# Altium PCB Mainboard + peripherals.PcbDoc
Units mm, origin at the board's own origin, x right, y up, seen from the top; angles counter-clockwise.
Board outline 62 x 49 mm, 2 copper layers (Top Layer, Bottom Layer); 9 components, 10 nets, 57 pads, 9 vias.
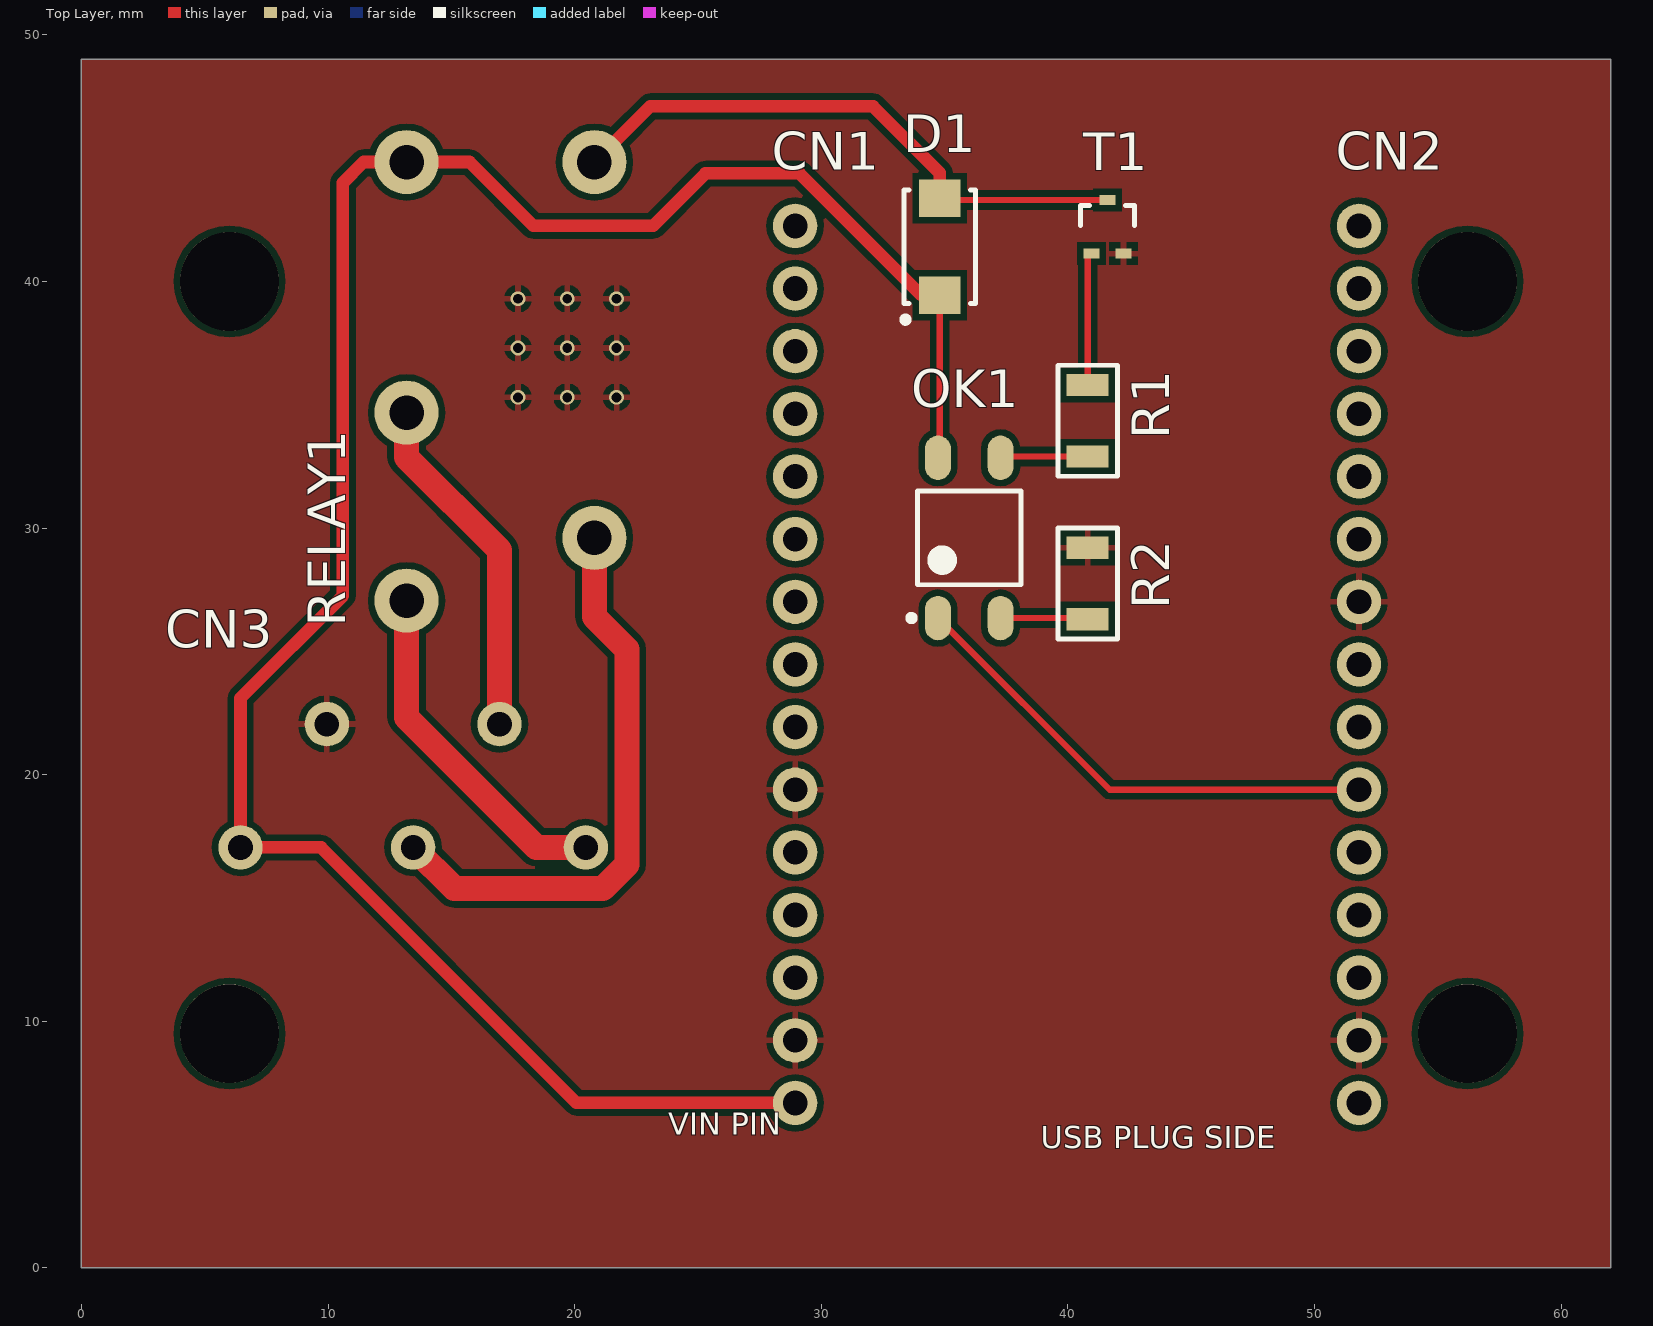
[diagram p0: Top Layer view]
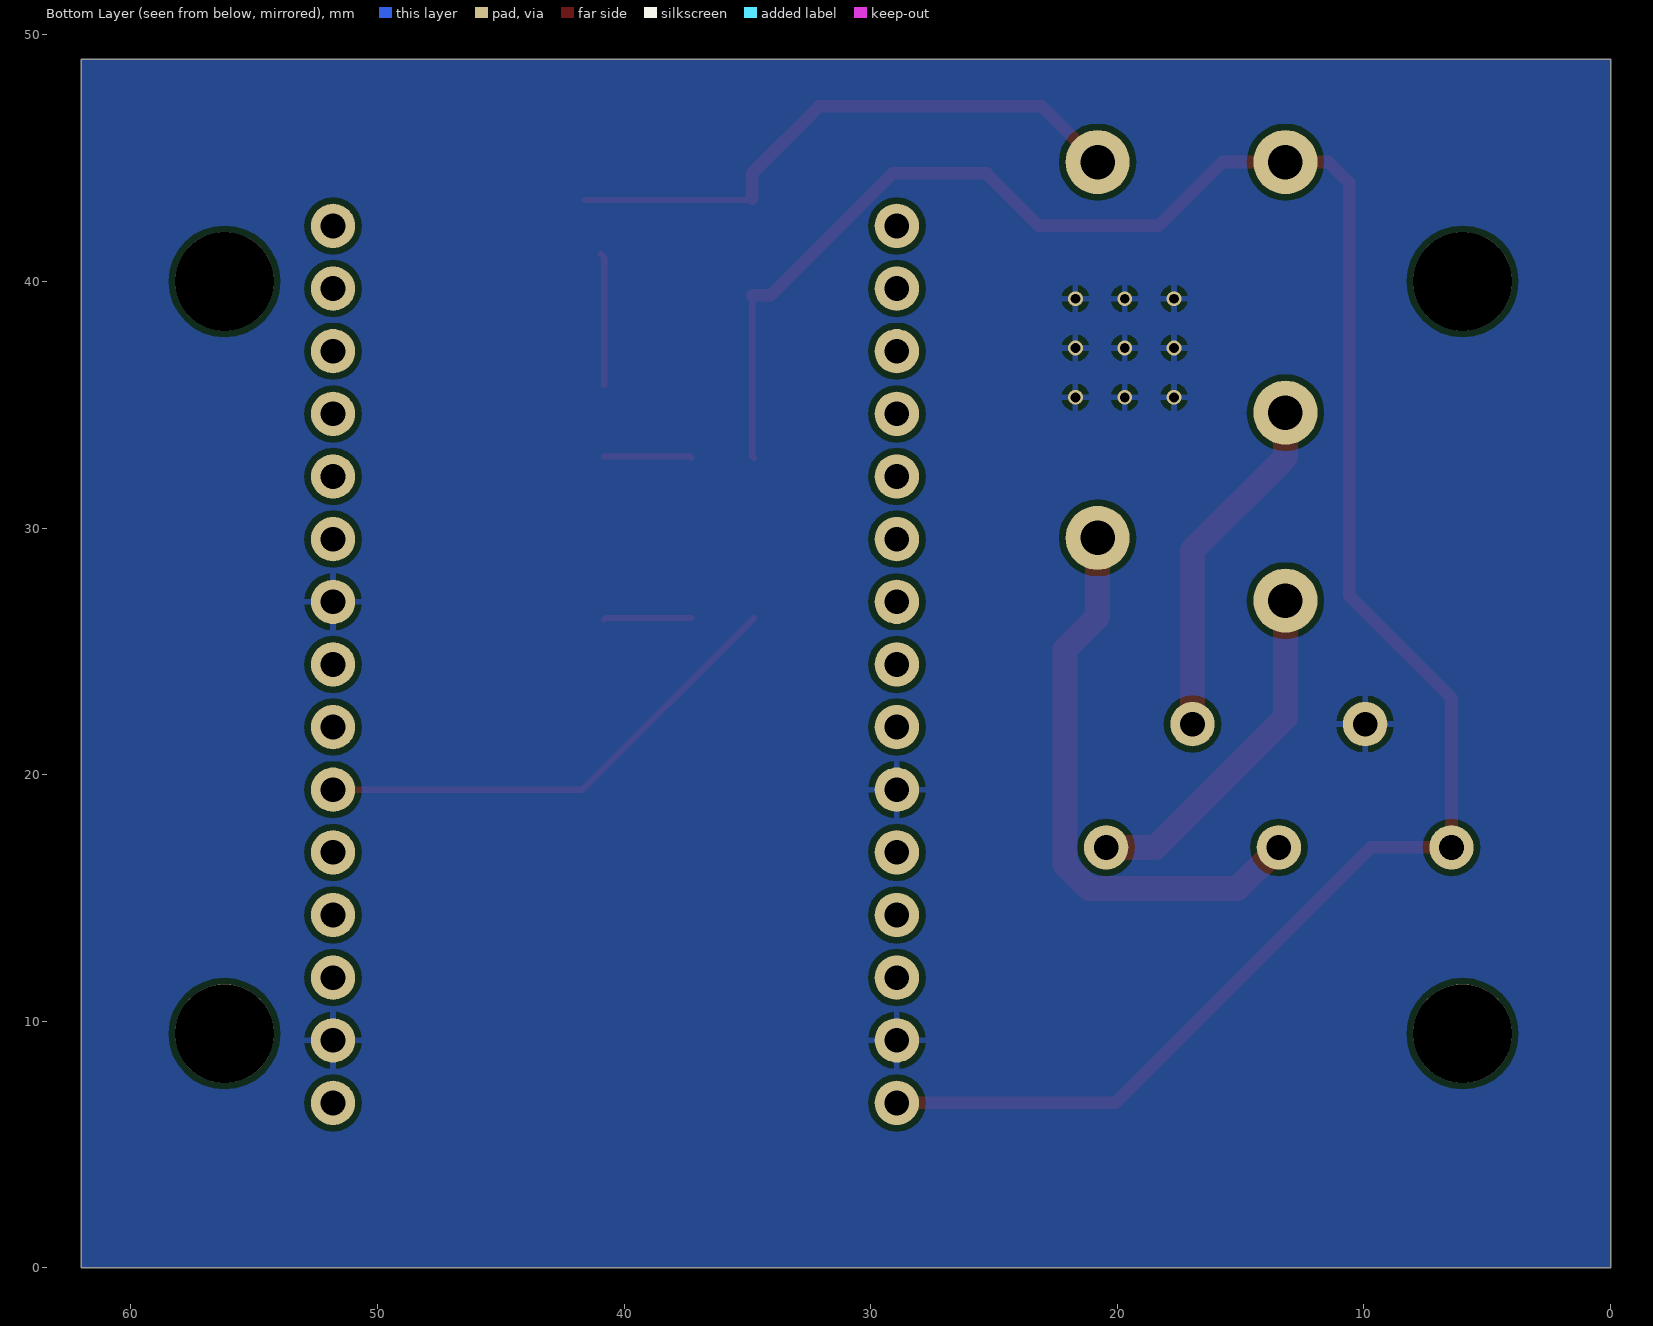
[diagram p1: Bottom Layer view, seen from below]
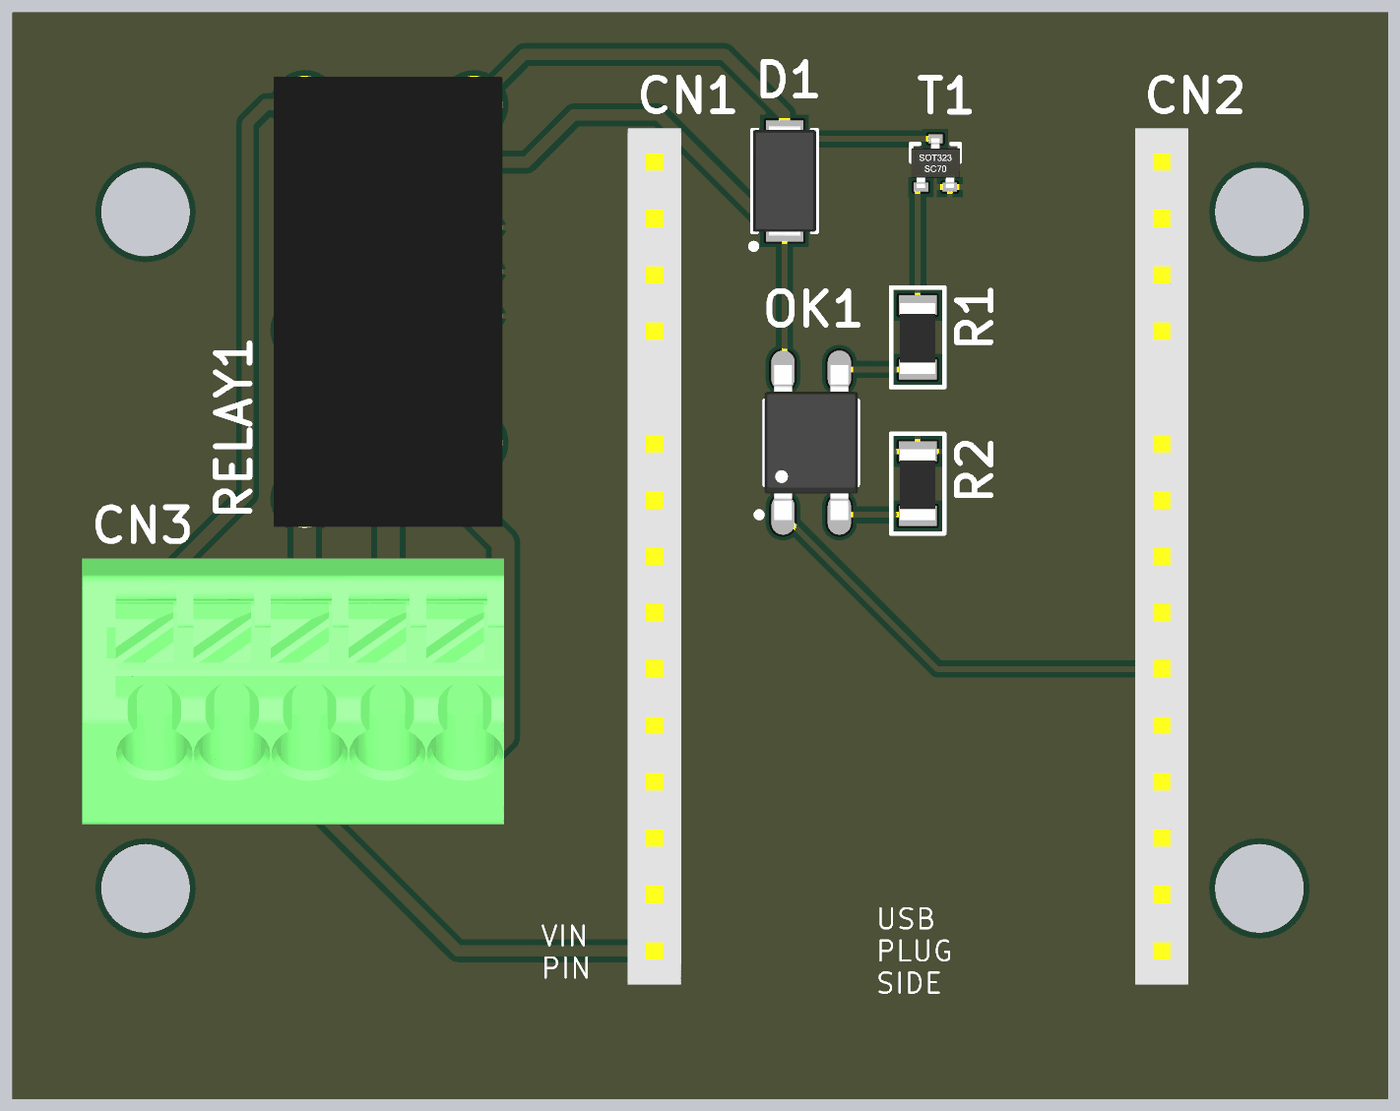
[diagram p2: 3D render of the assembled board from above, using the file's embedded part models]

## Layer stack, top to bottom
Top Solder: solder mask 0.0102, Solder Resist, Dk 3.5
Top Layer: signal copper 0.0356
Dielectric 1: dielectric 0.32, FR-4, Dk 4.8
Bottom Layer: signal copper 0.0356
Bottom Solder: solder mask 0.0102, Solder Resist, Dk 3.5

## Board outline
0,0 62,0 62,49 0,49

## Design rules (kind name [scope] priority, off if disabled: settings)
Clearance [All] p1: gap=0.254 ignorepadtopadclearanceinfootprint=FALSE except(0: Arc-Hole Track-Hole SMDPad-Hole THPad-Hole Via-Hole Fill-Hole Poly-Hole Region-Hole Text-Hole)
HoleSize [All] p1: absolutevalues=TRUE maxlimit=4 minlimit=0.025 maxpercent=80.000 minpercent=20.000
PolygonConnect [All] p1: connectstyle=Relief reliefconductorwidth=0.254 reliefentries=4 polygonreliefangle="90 Angle" airgapwidth=0.254
RoutingVias [All] p1: holewidth=0.711 width=1.27 viastyle="Through Hole" minholewidth=0.711 minwidth=1.27 maxholewidth=0.711 maxwidth=1.27
SilkToSolderMaskClearance [IsPad] p1: minsilkscreentomaskgap=0.2 clearancetoexposedcopper=TRUE
SolderMaskExpansion [All] p1: expansion=0.102
Width [All] p1: maxlimit=1.024 minlimit=0.254 preferedwidth=0.512
28 further rules are at their usual default settings.

## Components (designator, comment, footprint, x,y, rotation, side; value= is the part's Value field where it differs from the comment)
CN1 "SSW-115-01-T-S" SSW-115-01-T-S 28.94,6.69 r90 top locked
CN2 "SSW-115-01-T-S" SSW-115-01-T-S 51.8,6.69 r90 top locked
CN3 "1985221" "PTSA 1.5/5-3,5-Z" 6.45,17.05 r0 top locked
D1 "ES1H" DIOM4326X25N 34.8,41.4 r90 top
OK1 "VOM617A-8X001T" SOP254P700X200-4M 36,29.6 r90 top
R1 "1206 resistor" "Resistor 1206" 40.8,34.4 r90 top
R2 "1206 resistor" "Resistor 1206" 40.8,27.8 r90 top
RELAY1 "G5Q1EU12DC" "G5Q-1EU 12DC" 13.18,44.84 r270 top locked
T1 "BC817W.115" BC817W.115 41.6,42.4 r90 top

## Footprints (in the part's own frame and the unit in brackets; to place one, negate y for a bottom-side part, rotate by r counter-clockwise, add the part's x,y. Pads: shape width x height; smd on the part's side, far side on the other; paste and mask are expansions set on the pad)
BC817W.115 [mm] "SOT323, 3-Leads, Body 2,00x2,10mm, Pitch 1,30mm, IPC High Density"
  rect 0.4x0.65 smd: 1(-1.275,0.65) 2(-1.275,-0.65) 3(0.9,0)
  silkscreen extent -0.13,-1.1 0.67,1.1, body extent -1.32,-1.1 0.92,1.1, height 1.11
DIOM4326X25N [mm] "Molded Diode, 2-Leads, Body 4,33x2,56mm, IPC Medium Density"
  rect 1.52x1.68 smd: 1(-1.965,0) 2(1.965,0)
  silkscreen extent -3.07,-1.45 2.3,1.51, body extent -2.52,-1.42 2.52,1.42, height 2.5
"G5Q-1EU 12DC" [mm] "G5Q-1EU 12DC"
  round 2.6 hole 1.4 paste+0 mask+0: 1(0,0) 2(10.16,0) 3(17.78,0) 4(15.24,7.62) 5(0,7.62)
  body extent -1.26,-1.4 19.04,8.9, height 16.21
"PTSA 1.5/5-3,5-Z" [mm] "PTSA 1.5/5-3,5-Z"
  round 1.8 hole 1 paste+0 mask+0: 1(0,0) 2(3.5,5) 3(7,0) 4(10.5,5) 5(14,0)
  body extent -3.3,-4.67 15.7,7.33, height 13.11
"Resistor 1206" [mm]
  rect 0.9x1.7 smd: 1(-1.5,0) 2(1.4,0)
  silkscreen extent -2.3,-1.2 2.2,1.2, body extent -1.7,-0.8 1.5,0.8, height 0.61
SOP254P700X200-4M [mm] "SOP, 4-Leads, Body 3,85x4,40mm, Pitch 2,54mm, IPC Low Density"
  oval 1.8x1.05 smd: 1(-3.25,1.27) 2(-3.25,-1.27) 3(3.25,-1.27) 4(3.25,1.27)
  silkscreen extent -3.37,-2.1 1.9,2.47, body extent -3.49,-2.1 3.49,2.1, height 2
SSW-115-01-T-S [mm] "SSW-115-01-T-S"
  round 1.8 hole 1 paste+0 mask+0: 1(0,0) 2(2.54,0) 3(5.08,0) 4(7.62,0) 5(10.16,0) 6(12.7,0) 7(15.24,0) 8(17.78,0) 9(20.32,0) 10(22.86,0) 11(25.4,0) 12(27.94,0) 13(30.48,0) 14(33.02,0) 15(35.56,0)
  body extent -1.52,-1.21 37.08,1.21, height 8.52

## Part data
CN1 CN2: "SAMTEC         SSW-115-01-T-S             Board-To-Board Connector, SSW Series, 15 Contacts, Receptacle, 2.54 mm, Through Hole, 1 Rows", Color=Black, Contact Resistance=10mR, Manufacturer=Samtec, Max Current Rating=6.9A, Max Operating Temperature=105°C, Max Voltage Rating (AC)=550V, Min Operating Temperature=-55°C, Supplier Part Number 1=1804177, ComponentLink1Description=http://suddendocs.samtec.com/prints/ssw-1xx-xx-xxx-x-xx-xxx-xx-mkt.pdf?src-supplier=Digi-Key, ComponentLink1URL=http://suddendocs.samtec.com/prints/ssw-1xx-xx-xxx-x-xx-xxx-xx-mkt.pdf?src-supplier=Digi-Key, Connector Type=Receptacle,Socket, Contact Material=Bronze, Contact Plating=Tin,Matte, Depth=2.41mm, Gender=Receptacle, Housing Color=Black, Housing Material=Polymer, Lead Free="Lead Free", Length=38.61mm, Manufacturer Part Number=SSW-115-01-T-S, Mating Cycles=100, Mount="Through Hole", Number of Contacts=15, Number of Positions=15, Number of Rows=1, Orientation=Straight, Packaging=Bulk, Pitch=2.54mm, Radiation Hardening=No, REACH SVHC="No SVHC", Stock 1=0, Supplier 1=Farnell, Termination=Solder, Width=2.41mm
CN3: "TERM BLOCK 5POS 45DEG 3.5MM PCB", Color=Green, Current=2A, Flammability Rating="UL94 V-2", Manufacturer="Phoenix Contact", Max Supply Voltage=250V, Package Quantity=100, Supplier Part Number 1=1792772, Voltage=300V, Approvals=UL,VDE, ComponentLink1Description=http://components.arrow.com/part/dataview/43946157S8410404N1555?src-supplier=Arrow, ComponentLink1URL=http://components.arrow.com/part/dataview/43946157S8410404N1555?src-supplier=Arrow, ComponentLink2Description=https://media.digikey.com/pdf/Data%20Sheets/Phoenix%20Contact%20PDFs/COMBICON%20Spring-Cage%20PCB%20Term.%20Blocks.pdf?src-supplier=Digi-Key, ComponentLink2URL=https://media.digikey.com/pdf/Data%20Sheets/Phoenix%20Contact%20PDFs/COMBICON%20Spring-Cage%20PCB%20Term.%20Blocks.pdf?src-supplier=Digi-Key, Contact Material=Tin, Current Rating=2A, Depth=12mm, Height=13.1mm, Housing Color=Green, Housing Material=Polyamide, Insulation Material=Nylon, Lead Free="Lead Free", Length=12mm, Manufacturer Part Number=1985221, Material=Nylon, Max Current Rating=2A, Mount="Through Hole", Number of Circuits=5, Number of Contacts=5, Number of Levels=1, Number of Pins=5, Number of Poles=5, Number of Positions=5, Number of Positions Per Level=5, Number of Rows=1, Packaging=Bulk, Pitch=3.5mm, REACH SVHC=Unknown, Stock 1=178, Stripping Length=8mm, Supplier 1=Farnell, Termination=Solder, Voltage Rating=250V, Weight=0.087479oz, Width=19mm, Wire/Cable Gauge=16AWG, Wire Gauge (Max)=24AWG, Wire Gauge (Min)=16AWG
D1: "Rectifiers 1A,500V,SUPER FAST Surf Mt Rect", Forward Current=1A, Forward Voltage=1.7V, Manufacturer="Taiwan Semiconductor", Max Operating Temperature=150°C, Max Repetitive Reverse Voltage (Vrrm)=500V, Min Operating Temperature=-55°C, Package Quantity=7500, Peak Reverse Current=100uA, Supplier Part Number 1=2677280, ComponentLink1Description=http://uk.rs-online.com/webdocs/1298/0900766b81298786.pdf?src-supplier=RSComponents, ComponentLink1URL=http://uk.rs-online.com/webdocs/1298/0900766b81298786.pdf?src-supplier=RSComponents, ComponentLink2Description=http://www.taiwansemi.com/DSfile/ES1A%20SERIES_H13.pdf?src-supplier=Mouser, ComponentLink2URL=http://www.taiwansemi.com/DSfile/ES1A%20SERIES_H13.pdf?src-supplier=Mouser, Element Configuration=Single, Height=2.5mm, Lead Free="Lead Free", Length=4.6mm, Manufacturer Part Number=ES1H, Mount="Surface Mount", Number of Pins=2, Packaging="Tape and Reel", REACH SVHC="No SVHC", Reverse Recovery Time=35ns, Stock 1=0, Supplier 1=Farnell, Width=2.83mm
OK1: "VISHAY         VOM617A-8X001T             Transistor Output Optocoupler, Low Input Current, 1 Channel, SOP, 4 Pins, 60 mA, 3.75 kV, 130 %", Case/Package=SOP, Collector Emitter Saturation Voltage=400mV, Collector Emitter Voltage (VCEO)=80V, Current Transfer Ratio=260%, Forward Current=60mA, Forward Voltage=1.6V, Isolation Voltage=3.75kV, Manufacturer=Vishay, Max Collector Current=100mA, Max Operating Temperature=110°C, Max Power Dissipation=170mW, Min Operating Temperature=-55°C, Package Quantity=3000, Reverse Breakdown Voltage=6V, Supplier Part Number 1=2251591, ComponentLink1Description=http://www.farnell.com/datasheets/2050092.pdf?src-supplier=Element14, ComponentLink1URL=http://www.farnell.com/datasheets/2050092.pdf?src-supplier=Element14, ComponentLink2Description=http://www.vishay.com/docs/83446/vom617a.pdf?src-supplier=Avnet+Europe, ComponentLink2URL=http://www.vishay.com/docs/83446/vom617a.pdf?src-supplier=Avnet+Europe, ComponentLink3Description=http://www.vishay.com/docs/83446/vom617a.pdf?src-supplier=Digi-Key, ComponentLink3URL=http://www.vishay.com/docs/83446/vom617a.pdf?src-supplier=Digi-Key, ComponentLink4Description=http://www.vishay.com/docs/83446/vom617a.pdf?src-supplier=Avnet, ComponentLink4URL=http://www.vishay.com/docs/83446/vom617a.pdf?src-supplier=Avnet, Fall Time=12us, Input Current=60mA, Manufacturer Part Number=VOM617A-8X001T, Max Input Current=60mA, Mount="Surface Mount", Number of Channels=1, Number of Elements=1, Number of Pins=4, Output Current per Channel=100mA, Output Voltage=80V, Packaging="Tape and Reel", Power Dissipation=170mW, Radiation Hardening=No, REACH SVHC=Unknown, Rise Time=7us, Stock 1=859, Supplier 1=Farnell
R1 R2: library part CRCW1206220RJNTABC, "Resistor: thick film; SMD; 1206; 220O; 0.25W; ±5%; -55÷125°C", Case/Package=1206, Manufacturer=Vishay, Power Rating=250mW, Resistance=1k, Tolerance=5%, Lead Free="Contains Lead", Manufacturer Part Number=CRCW1206220RJNTABC, Pricing 1="100=0.0314, 500=0.01833, 1000=0.01178, 5000=0.005, 15000=0.00487 (USD)", Stock 1=277400, Supplier 1=TME, Supplier Part Number 1=CRCW1206220RJNTABC
RELAY1: "PCB power relay 12 VDC 400 mW, G5Q1EU12DC, Omron Electronic Components", Coil Current=33.3mA, Coil Power=400mW, Coil Resistance=360R, Coil Voltage (DC)=12V, Contact Current Rating=10A, Contact Resistance=100mR, Insulation Resistance=100MR, Manufacturer=Omron, Max Operating Temperature=85°C, Min Operating Temperature=-40°C, Ratings=IP67, Supplier Part Number 1=4446434, Switching Capacity=1.25kW, Voltage Rating (AC)=277V, Voltage Rating (DC)=30V, Coil Type=Non-Latching, ComponentLink1Description=http://www.produktinfo.conrad.com/datenblaetter/500000-524999/503931-da-01-en-KOMPAKT_PCB_POWERRELAIS_G5Q_1_EU_12DC.pdf?src-supplier=Conrad, ComponentLink1URL=http://www.produktinfo.conrad.com/datenblaetter/500000-524999/503931-da-01-en-KOMPAKT_PCB_POWERRELAIS_G5Q_1_EU_12DC.pdf?src-supplier=Conrad, Contact Material=Silver, Current Rating=33.3mA, Depth=10.3mm, Height=15.8mm, Length=20.3mm, Manufacturer Part Number=G5Q1EU12DC, Mount=PCB, Number of Pins=5, Operate Time=10ms, Radiation Hardening=No, REACH SVHC=Unknown, Stock 1=634, Supplier 1=Farnell, Switching Current=10A, Termination="PC Pin", Throw Configuration=SPDT, Width=10.3mm
T1: library part BC817W,115, "TRANS NPN 45V 0.5A SOT323", Manufacturer="Nexperia USA", Supplier Part Number 1=2439014, Manufacturer Part Number=BC817W,115, Stock 1=0, Supplier 1=Farnell

## Free pads (board coordinates)
  round 4 hole 4 unplated paste+0 mask+0: ""(6,9.5) ""(6,40) ""(56.2,9.5) ""(56.2,40)

## Via types
v1: diameter 0.6, hole 0.4, Top Layer to Bottom Layer, 9 vias

## Nets (pads, with @x,y where several pads share a name; then routed paths per layer and width w, separated by ;. In a path a pad name is that pad's centre, name@x,y a point inside that pad or via, vN(x,y) a via of type N, cw(c..) or ccw(c..) an arc to the next point about the centre after c; other vN are vias at no path point)
COM: CN3.4 RELAY1.2 | length 14.2
  Top Layer w1.024: RELAY1.2 13.18,32.87 16.95,29.1 CN3.4
GND: CN1.2 CN1.6 CN2.2 CN2.9 CN3.2 R2.2 T1.2
  other v1: 17.7,35.3 19.7,35.3 21.7,35.3 17.7,37.3 19.7,37.3 21.7,37.3 17.7,39.3 19.7,39.3 21.7,39.3
NC: CN3.3 RELAY1.4 | length 23.5
  Top Layer w1.024: CN3.3 15.116,15.384 21.14,15.384 22.116,16.36 22.116,25.084 20.8,26.4 RELAY1.4
NetCN2_6: CN2.6 OK1.1 | length 20
  Top Layer w0.254: OK1.1 41.69,19.39 CN2.6
NetD1_2: D1.2 RELAY1.5 T1.3 | length 23.9
  Top Layer w0.254: D1.2 34.865,43.3 T1.3
  Top Layer w0.512: RELAY1.5 23.06,47.1 32.1,47.1 34.8,44.4 D1.2
NetOK1_2: OK1.2 R2.1 | length 3.6
  Top Layer w0.254: OK1.2 40.75,26.35 R2.1
NetOK1_3: OK1.3 R1.1 | length 3.6
  Top Layer w0.254: OK1.3 37.32,32.9 R1.1
NetR1_2: R1.2 T1.1 | length 5.4
  Top Layer w0.254: R1.2 40.8,40.975 T1.1
NO: CN3.5 RELAY1.3 | length 14.2
  Top Layer w1.024: RELAY1.3 13.18,22.32 18.45,17.05 CN3.5
Vin: CN1.1 CN3.1 D1.1 OK1.4 RELAY1.1 | length 90.6
  Top Layer w0.254: OK1.4 34.8,32.92 D1.1
  Top Layer w0.512: CN1.1 20.072,6.69 9.712,17.05 CN3.1 6.45,23.106 10.6,27.256 10.6,44 11.44,44.84 RELAY1.1 15.735,44.84 18.325,42.25 23.175,42.25 25.304,44.379 29.121,44.379 34.065,39.435 D1.1
pads on no net: CN1.3 CN1.4 CN1.5 CN1.7 CN1.8 CN1.9 CN1.10 CN1.11 CN1.12 CN1.13 CN1.14 CN1.15 CN2.1 CN2.3 CN2.4 CN2.5 CN2.7 CN2.8 CN2.10 CN2.11 CN2.12 CN2.13 CN2.14 CN2.15

## Polygon pours and split planes (outlines as drawn)
GND on Top Layer "Top Layer-GND" (solid, remove dead copper, pour order 0): 62,0 0,0 0,49 62,49
GND on Bottom Layer "Bottom Layer-GND" (solid, remove dead copper, pour order 2): 62,0 0,0 0,49 62,49

## Silkscreen, mask and mechanical layers (free items; w line width, h text height)
Top Overlay:
  text "VIN PIN" at 23.8,5.4 h0.9
  text "USB PLUG SIDE" at 38.9,4.85 h0.9